# Altium PCB Sucker_PCB.PcbDoc
Units mm, origin at the board's own origin, x right, y up, seen from the top; angles counter-clockwise.
Board outline 60 x 30 mm, 4 copper layers (Top Layer, Internal Plane 1, Internal Plane 2, Bottom Layer), stack 0.462 mm thick; 14 components, 17 nets, 88 pads, 9 vias.
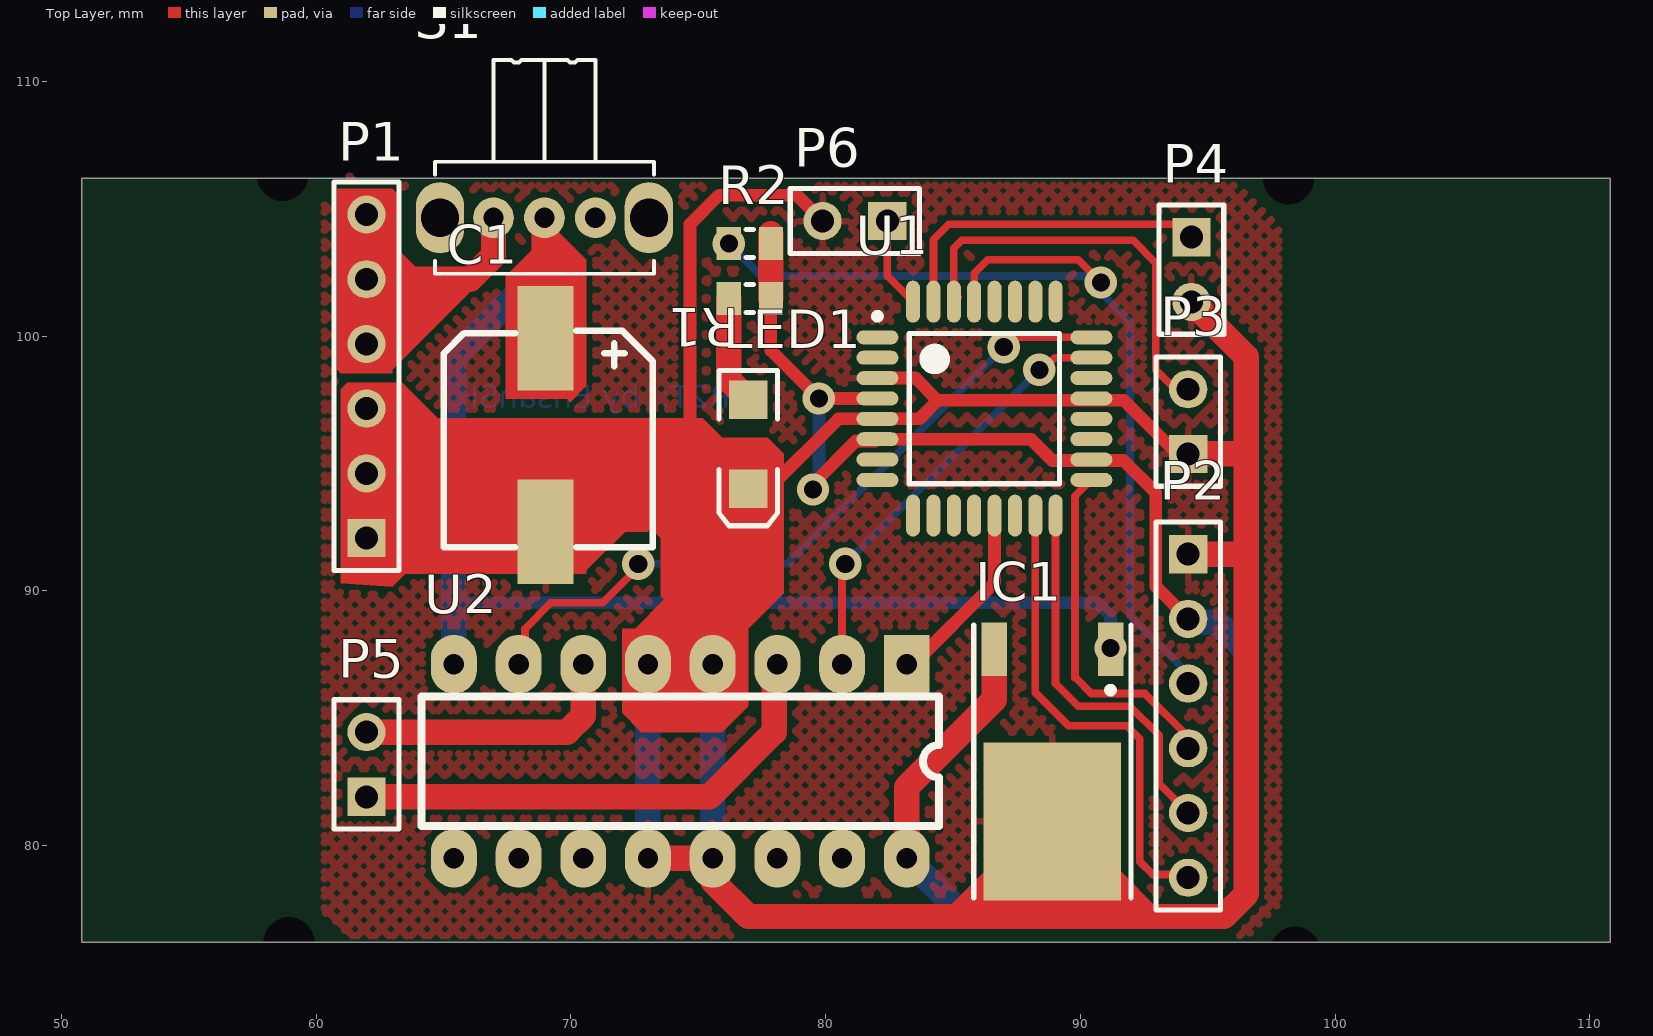
[diagram p0: Top Layer view]
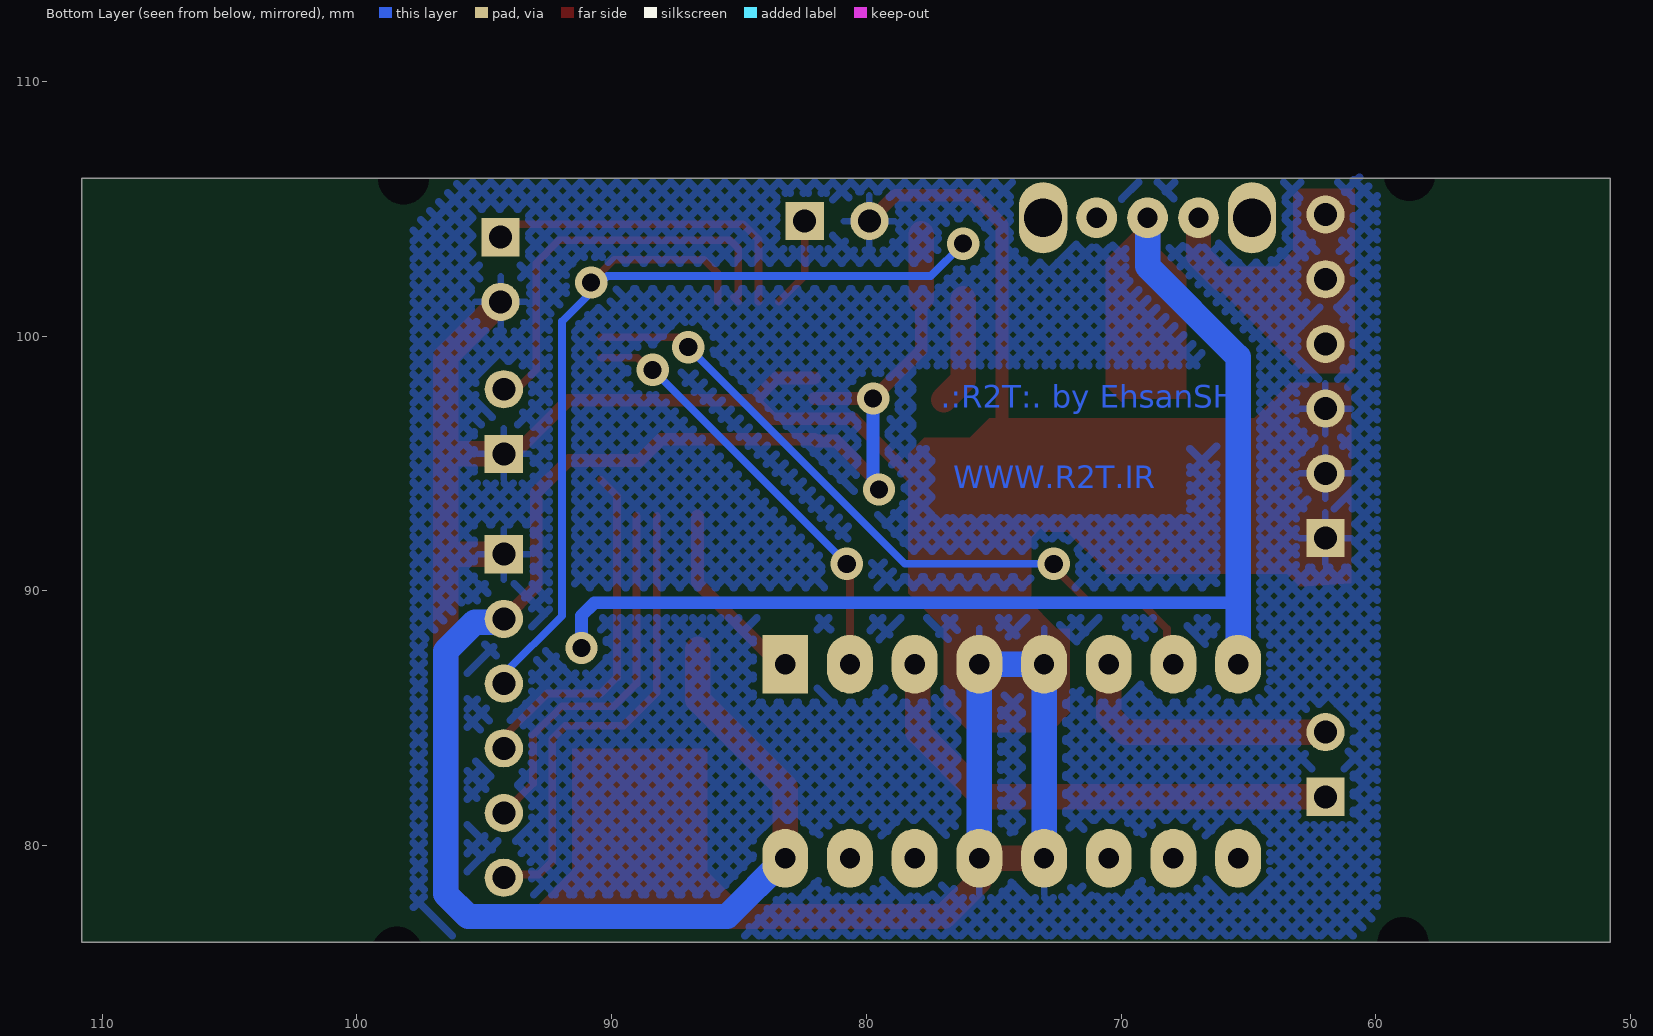
[diagram p1: Bottom Layer view, seen from below]
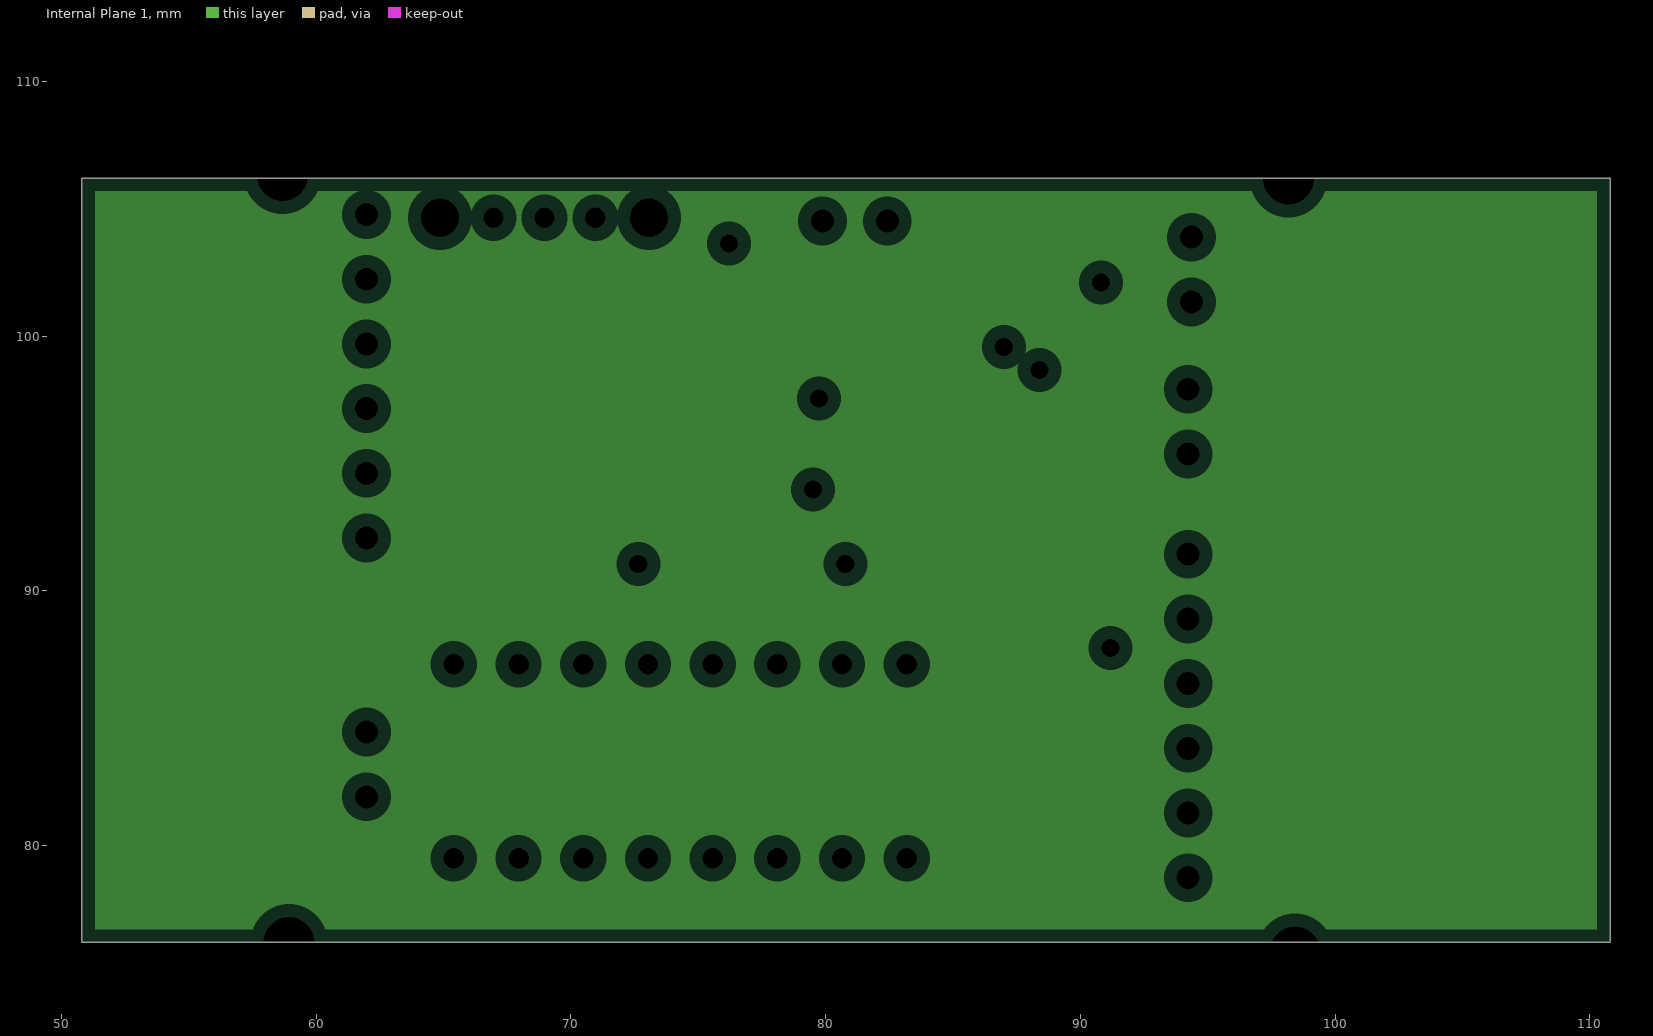
[diagram p2: Internal Plane 1, clearances drawn from the general rule]
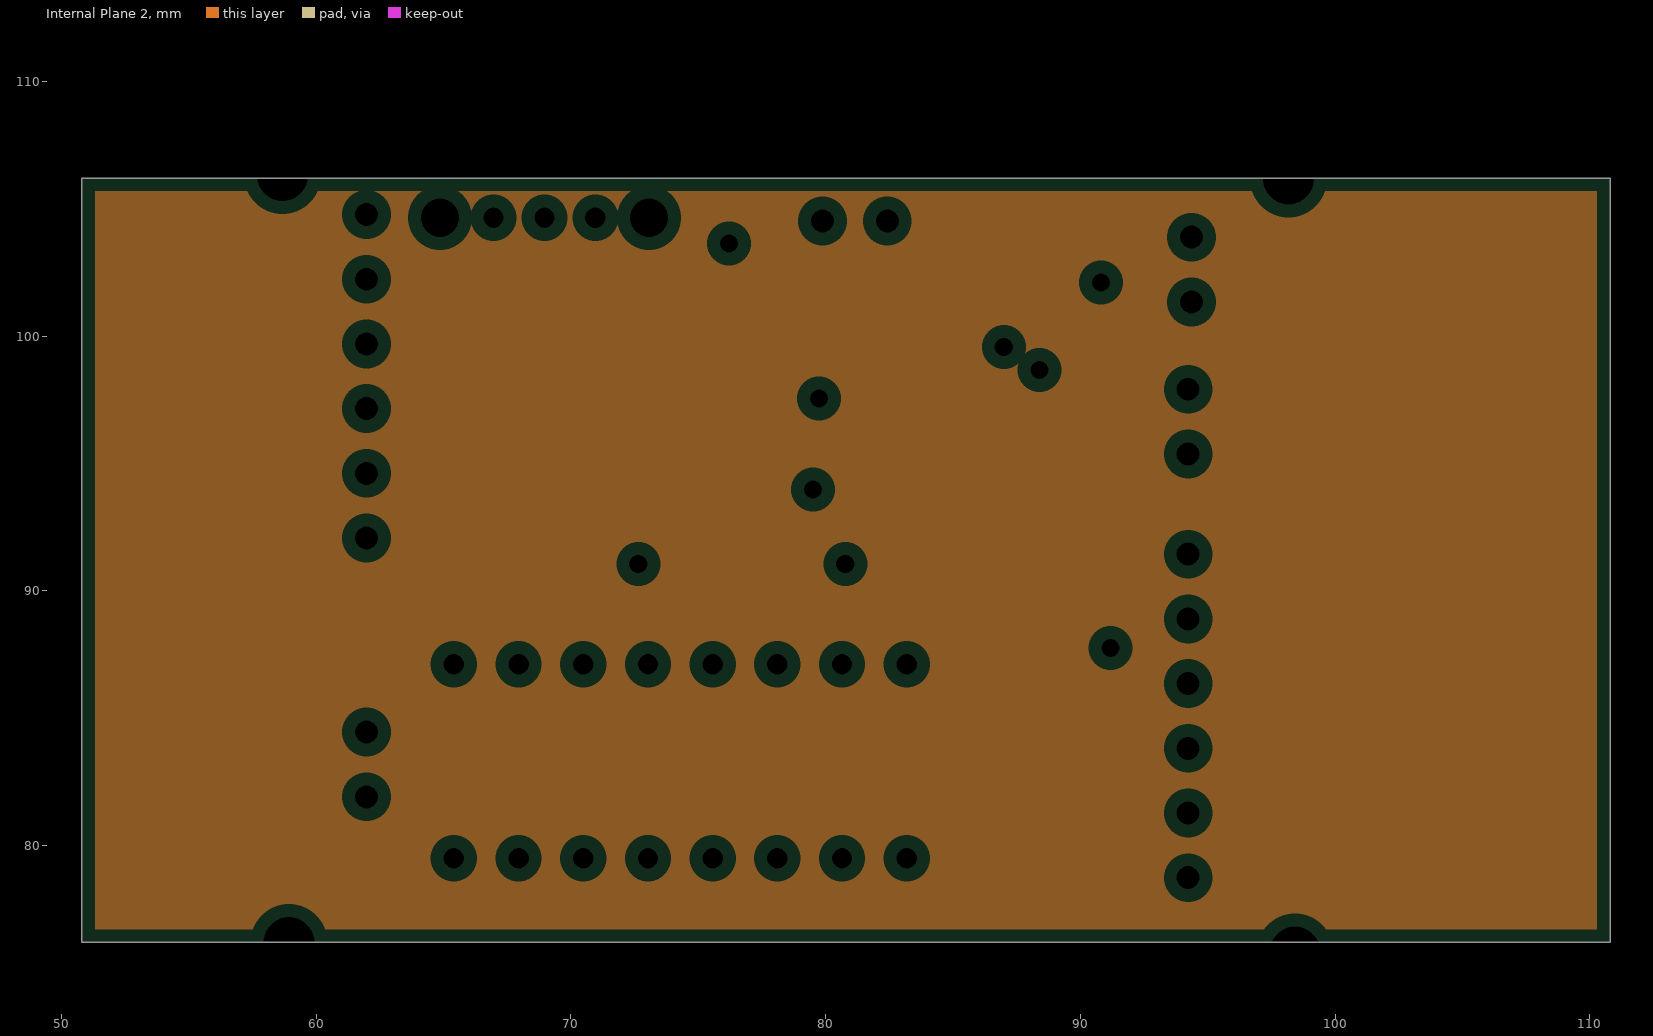
[diagram p3: Internal Plane 2, clearances drawn from the general rule]

## Layer stack, top to bottom
Top Solder: solder mask 0.0102, Solder Resist, Dk 3.5
Top Layer: signal copper 0.0356
Internal Plane 1: plane copper 0.0356
Internal Plane 2: plane copper 0.0356
Dielectric 1: dielectric 0.32, FR-4, Dk 4.8
Bottom Layer: signal copper 0.0356
Bottom Solder: solder mask 0.0102, Solder Resist, Dk 3.5

## Board outline
50.8,76.2 110.8,76.2 110.8,106.2 50.8,106.2

## Design rules (kind name [scope] priority, off if disabled: settings)
Clearance [All] p1: gap=0.2
PlaneClearance [All] p1: clearance=0.508
PlaneConnect [All] p1: planeconnectstyle=Relief reliefexpansion=0.508 reliefentries=4 reliefconductorwidth=0.254 reliefairgap=0.254
PolygonConnect [All] p1: connectstyle=Relief reliefconductorwidth=0.254 reliefentries=4 polygonreliefangle="90 Angle" airgapwidth=0.254
RoutingVias [All] p1: holewidth=0.6 width=1 viastyle="Through Hole" minholewidth=0.711 minwidth=1.27 maxholewidth=0.711 maxwidth=1.27
SolderMaskExpansion [All] p1: expansion=0.102
Width [All] p1: maxlimit=1 minlimit=0.3 preferedwidth=0.5
27 further rules are at their usual default settings.

## Components (designator, comment, footprint, x,y, rotation, side; value= is the part's Value field where it differs from the comment)
C1 "Capacitor Polarized" "Electrolytic Capacitor SMD Dia-8" 68.707,99.822 r270 top
IC1 "L78M05" TO-252 88.9,84.328 r180 top
LED1 "Red" "LED SMD 1206" 76.962,95.758 r270 top
P1 "Power" HDR1X6 61.976,92.075 r90 top
P2 "Programmer" HDR1X6 94.234,91.44 r270 top
P3 "SpdUP" HDR1X2 94.234,95.377 r90 top
P4 "SPDDN" HDR1X2 94.361,103.886 r270 top
P5 "Header 2" HDR1X2 61.976,81.915 r90 top
P6 "way" HDR1X2 82.423,104.521 r180 top
R1 "470" "RES 0805 (2012X06L)" 77.85,101.473 r180 top
R2 "1K" "RES 0805 (2012X06L)" 76.2,103.632 r0 top
S1 "Switch SPDT_Subminiator" "SPDT Subminiator" 68.961,104.648 r0 top
U1 "ATmega8-16AI" 32A_N 86.233,97.155 r0 top
U2 "L293D" DIP16 83.185,87.122 r270 top

## Footprints (in the part's own frame and the unit in brackets; to place one, negate y for a bottom-side part, rotate by r counter-clockwise, add the part's x,y. Pads: shape width x height; smd on the part's side, far side on the other; paste and mask are expansions set on the pad)
32A_N [mm] "Thin QFP, 32-Leads, Body 7x7mm, Pitch 0.8mm, IPC Medium Density"
  oval 1.65x0.55 smd: 1(-4.2,2.8) 2(-4.2,2) 3(-4.2,1.2) 4(-4.2,0.4) 5(-4.2,-0.4) 6(-4.2,-1.2) 7(-4.2,-2) 8(-4.2,-2.8) 17(4.2,-2.8) 18(4.2,-2) 19(4.2,-1.2) 20(4.2,-0.4) 21(4.2,0.4) 22(4.2,1.2) 23(4.2,2) 24(4.2,2.8)
  oval 0.55x1.65 smd: 9(-2.8,-4.2) 10(-2,-4.2) 11(-1.2,-4.2) 12(-0.4,-4.2) 13(0.4,-4.2) 14(1.2,-4.2) 15(2,-4.2) 16(2.8,-4.2) 25(2.8,4.2) 26(2,4.2) 27(1.2,4.2) 28(0.4,4.2) 29(-0.4,4.2) 30(-1.2,4.2) 31(-2,4.2) 32(-2.8,4.2)
  silkscreen extent -4.32,-2.95 2.95,3.75, body extent -3.5,-3.5 3.5,3.5, height 1.2
DIP16 [mm]
  rect 2.3x1.8 hole 0.8: 1(0,0)
  oval 2.3x1.8 hole 0.8: 2(0,-2.54) 3(0,-5.08) 4(0,-7.62) 5(0,-10.16) 6(0,-12.7) 7(0,-15.24) 8(0,-17.78) 9(7.62,-17.78) 10(7.62,-15.24) 11(7.62,-12.7) 12(7.62,-10.16) 13(7.62,-7.62) 14(7.62,-5.08) 15(7.62,-2.54) 16(7.62,0)
  silkscreen extent 1.27,-19.05 6.35,1.27
"Electrolytic Capacitor SMD Dia-8" [mm] "470uf,6.3v,16v"
  rect 4.1x2.2 smd: 1(-0.1,0.3) 2(7.5,0.3)
  silkscreen extent -0.4,-3.7 8.1,4.5, body extent -0.6,-3.7 8.4,4.6, height 11.9
HDR1X2 [mm] "Connector; Header; 2 Position"
  rect 1.5x1.5 hole 0.9: 1(0,0)
  round 1.5 hole 0.9: 2(2.54,0)
  silkscreen extent -1.27,-1.27 3.81,1.27
HDR1X6 [mm] "Connector; Header; 6 Position"
  rect 1.5x1.5 hole 0.9: 1(0,0)
  round 1.5 hole 0.9: 2(2.54,0) 3(5.08,0) 4(7.62,0) 5(10.16,0) 6(12.7,0)
  silkscreen extent -1.27,-1.27 13.97,1.27
"LED SMD 1206" [mm]
  rect 1.5x1.5 smd: 1(-1.75,0) 2(1.75,0)
  silkscreen extent -2.9,-1.15 3.2,1.15, body extent -1.65,-0.76 1.65,0.69, height 1.36
"RES 0805 (2012X06L)" [mm] "Chip Resistor, 2-Leads, Body 2.0x1.3mm, IPC High Density _ (0.100 W)"
  rect 0.95x1.3 smd: 1(0,0) 2(1.65,0)
  silkscreen extent 0.67,-0.55 0.97,0.55, body extent -0.19,-0.63 1.84,0.64, height 0.6
"SPDT Subminiator" [mm] "Subminiator SPDT switch"
  round 1.6 hole 0.8: 1(2,0) 2(0,0) 3(-2,0)
  oval 1.9x2.8 hole 1.5: M2(-4.1,0) M2(4.1,0)
  silkscreen extent -4.3,-2.2 4.3,6.2, body extent -4.31,-2.28 4.3,6.09, height 4.7
TO-252 [mm] "D-PAK/TO-252-AA; 3 Leads (1 Cropped); Body 10.1 (inc. leads) x 6.6 mm (LxW max)"
  rect 1x2.1 smd: 1(-2.285,-3.375) 3(2.285,-3.375)
  rect 5.4x6.2 smd: 4(0,3.375)
  silkscreen extent -3.08,-4.32 3.09,6.38, body extent -3.27,-4.11 3.27,5.83, height 2.39

## Part data
IC1: "Precision 500mA Regulator"
LED1: library part LED, "LED"
P1 P2: library part "Header 6", "Header, 6-Pin"
P3 P4 P6: library part "Header 2", "Header, 2-Pin"
P5: "Header, 2-Pin"
R1 R2: library part Resistor, "Resistor"
S1: "Subminiator SPDT Switch"
U1: "8-Bit AVR Microcontroller with 8K Bytes of In-System Programmable Flash Memory"

## Free pads (board coordinates)
  round 1.524 hole 2: 3(98.171,106.172) 4(58.674,106.299) 5(58.928,76.2) 6(98.425,75.819)

## Via types
v1: diameter 1.27, hole 0.711, Top Layer to Bottom Layer, 9 vias

## Nets (pads, with @x,y where several pads share a name; then routed paths per layer and width w, separated by ;. In a path a pad name is that pad's centre, name@x,y a point inside that pad or via, vN(x,y) a via of type N, cw(c..) or ccw(c..) an arc to the next point about the centre after c; other vN are vias at no path point)
GND: C1.2 IC1.4 LED1.2 P1.1 P1.2 P1.3 P2.1 P3.1 P4.2 P6.2 U1.3 U1.5 U1.21 U2.4 U2.5 U2.12 U2.13 | length 146.7
  Top Layer w0.5: U2.4 74.676,88.011 74.676,94.008 74.676,104.394 75.819,105.537 78.867,105.537 P6.2 ; LED1.2 77.752,94.008 80.499,96.755 U1.5 83.674,96.755 84.399,97.48 ; U1.3 83.524,98.355 84.399,97.48 ; P3.1 93.811,95.377 91.708,97.48 84.399,97.48
  Top Layer w1: P1.3 P1.2 P1.1 68.76,92.075 C1.2 70.693,94.008 74.676,94.008 LED1.2 ; U2.12 U2.13 75.565,78.613 76.962,77.216 85.163,77.216 ; U2.5 U2.4 ; IC1.4 85.163,77.216 ; P2.1 96.393,91.44 96.52,91.567 ; P3.1 96.393,95.377 96.52,95.25 ; P4.2 96.52,99.187 96.52,95.25 ; 85.163,77.216 95.631,77.216 96.52,78.105 96.52,91.567 ; 96.52,91.567 96.52,95.25
  Bottom Layer w1: U2.12 U2.5 U2.4 U2.13
M+: P5.1 U2.3 | length 19.8
  Top Layer w1: P5.1 75.438,81.915 77.978,84.455 77.978,86.995 U2.3
M-: P5.2 U2.6 | length 10.8
  Top Layer w1: P5.2 69.85,84.455 70.485,85.09 U2.6
MISO: P2.5 U1.16 | length 15
  Top Layer w0.3: U1.16 89.027,92.949 89.027,86.36 89.916,85.471 91.948,85.471 93.091,84.328 93.091,82.423 P2.5
MOSI: P2.6 U1.15 | length 18.8
  Top Layer w0.3: U1.15 88.233,86.011 89.535,84.709 91.821,84.709 92.329,84.201 92.329,79.375 92.837,78.867 94.107,78.867 P2.6
NetLED1_1: LED1.1 R1.2 | length 4.3
  Top Layer w1: R1.2 76.2,98.27 LED1.1
NetP1_4: P1.4 P1.5 P1.6 S1.3 | length 11.9
  Top Layer w1: P1.4 P1.5 ; P1.6 P1.5 ; S1.3 66.961,103.156 66.04,102.235 P1.5
NetP3_2: P3.2 U1.30 | length 16.5
  Top Layer w0.3: U1.30@85.208,101.53 U1.30 85.033,103.448 85.344,103.759 92.075,103.759 92.964,102.87 92.964,98.679 93.726,97.917 P3.2
NetP4_1: P4.1 U1.31 | length 13
  Top Layer w0.3: U1.31 84.233,103.791 84.836,104.394 93.853,104.394 P4.1
NetP6_1: P6.1 U1.32 | length 3.6
  Top Layer w0.3: P6.1 82.423,102.365 U1.32
NetU1_23: U1.23 U2.2 | length 17.1
  Top Layer w0.3: U2.2 80.645,91.059 v1(80.772,91.059) ; v1(88.392,98.679) 88.519,98.679 88.995,99.155 U1.23
  Bottom Layer w0.3: v1(80.772,91.059) v1(88.392,98.679)
NetU1_24: U1.24 U2.7 | length 28.5
  Top Layer w0.3: U2.7 68.199,87.376 68.199,88.519 69.215,89.535 71.247,89.535 72.644,90.932 v1(72.644,91.059) ; v1(86.995,99.568) 87.382,99.955 U1.24
  Bottom Layer w0.3: v1(72.644,91.059) 78.486,91.059 v1(86.995,99.568)
PWM: U1.13 U2.1 | length 7.4
  Top Layer w0.5: U2.1 83.439,87.122 86.633,90.316 U1.13
RES: P2.3 R2.1 U1.29 | length 38.9
  Top Layer w0.3: U1.29 85.833,102.47 86.36,102.997 89.916,102.997 v1(90.805,102.108)
  Bottom Layer w0.3: v1(76.2,103.632) 77.47,102.362 90.17,102.362 91.948,100.584 91.948,89.027 94.234,86.741 P2.3
SCK: P2.4 U1.17 | length 13.9
  Top Layer w0.3: U1.17 89.789,93.711 89.789,86.583 89.82,86.583 90.432,85.971 92.536,85.971 94.234,84.273 P2.4
VCC: IC1.3 P2.2 R1.1 R2.2 U1.4 U1.6 U1.18 U2.16 | length 70.6
  Top Layer w0.5: R1.1 77.85,99.442 v1(79.737,97.555) U1.4 ; v1(79.502,93.98) 79.502,94.199 81.183,95.88 81.958,95.88 U1.6 88.068,95.955 88.9,95.123 91.694,95.123 92.964,93.853 92.964,90.17 P2.2
  Top Layer w1: R1.1 R2.2 77.85,104.012 R2.2@77.851,104.013 ; U2.16 83.185,82.296 86.615,85.726 IC1.3
  Bottom Layer w0.5: v1(79.502,93.98) 79.737,94.215 v1(79.737,97.555)
  Bottom Layer w1: U2.16 85.471,77.216 95.631,77.216 96.52,78.105 96.52,87.63 95.377,88.773 94.361,88.773 P2.2
VCC+12: C1.1 IC1.1 S1.2 U2.8 | length 51.4
  Top Layer w1: S1.2 68.961,99.968 C1.1
  Bottom Layer w0.5: 65.405,89.535 90.678,89.535 91.186,89.027 v1@91.186,87.376
  Bottom Layer w1: U2.8 65.405,89.535 65.405,99.187 68.961,102.743 S1.2
  other v1: 91.186,87.757
pads on no net: S1.1 S1.M2 U1.1 U1.2 U1.7 U1.8 U1.9 U1.10 U1.11 U1.12 U1.14 U1.19 U1.20 U1.22 U1.25 U1.26 U1.27 U1.28 U2.9 U2.10 U2.11 U2.14 U2.15

## Polygon pours and split planes (outlines as drawn)
GND on Bottom Layer "Top Layer-No Net" (hatched 45Degree grid 0.5 track 0.3, pour order 4): 97.536,77.343 97.282,77.343 96.393,76.454 60.96,76.454 60.833,76.454 60.071,77.216 59.944,77.343 59.944,105.283 59.944,105.537 60.706,106.299 60.96,106.045 95.885,106.045 96.012,106.045 97.409,104.648 97.79,104.267 97.79,77.597
GND on Top Layer "Top Layer-No Net" (hatched 45Degree grid 0.5 track 0.3, pour order 6): 61.202,106.299 60.45,105.537 60.325,105.41 60.325,77.343 60.45,77.343 61.327,76.454 96.537,76.454 97.79,77.724 97.79,104.14 97.79,104.267 96.161,105.918 61.703,105.918 61.327,106.299 60.576,105.537 60.45,105.537

## Other copper
Top Layer:
  rectangle net NetP1_4: 61.087,98.552 62.992,105.791
  rectangle net GND: 61.087,90.932 62.992,98.044
  rectangle net GND: 86.233,77.216 91.567,83.82
  region net NetP1_4: 62.992,105.791 63.246,105.537 63.246,103.378 64.389,102.235 66.04,102.235 66.04,101.981 66.167,101.854 62.992,98.679 62.992,98.552 60.96,98.552 60.833,98.679 60.833,105.791
  region net GND: 60.96,97.917 60.96,90.297 62.992,90.17 63.627,90.805 63.627,97.917 63.373,98.171 61.214,98.171
  region net VCC+12: 68.961,104.648 70.612,102.997 70.612,98.044 69.977,97.409 69.85,97.536 67.437,97.536 67.437,102.362 68.453,103.378 68.453,104.521 68.834,104.521
  region net GND: 63.246,98.044 63.373,98.171 64.77,96.774 75.184,96.774 75.946,96.012 77.724,96.012 78.359,95.377 78.359,89.916 76.962,88.519 76.962,85.471 75.946,84.455 72.771,84.455 72.009,85.217 72.009,88.519 72.517,88.519 73.66,89.662 73.533,89.789 73.533,92.075 73.152,92.456 73.025,92.329 72.136,92.329 70.612,90.805 70.612,90.678 63.5,90.678 63.309,90.487 61.087,92.71 61.087,96.139 62.992,98.044
  region net GND: 91.44,79.121 93.091,77.47 90.551,77.47 91.186,78.105 91.186,78.994
Bottom Layer:
  text ".:R2T:. by EhsanSH" at 77.089,96.901 h1.52
  text "WWW.R2T.IR" at 76.581,93.726 h1.52

## Silkscreen, mask and mechanical layers (free items; w line width, h text height)
Mechanical 1:
  lines w0.254: 57.404,74.422 57.404,107.569 99.822,107.569 99.822,74.422 57.404,74.422